# Altium PCB PCB1.PcbDoc (part 11 of 12)
Units mm, origin at the board's own origin, x right, y up, seen from the top; angles counter-clockwise.
Board outline 122.17 x 121.67 mm, 2 copper layers (Top Layer, Bottom Layer); 274 components, 225 nets, 941 pads, 421 vias.
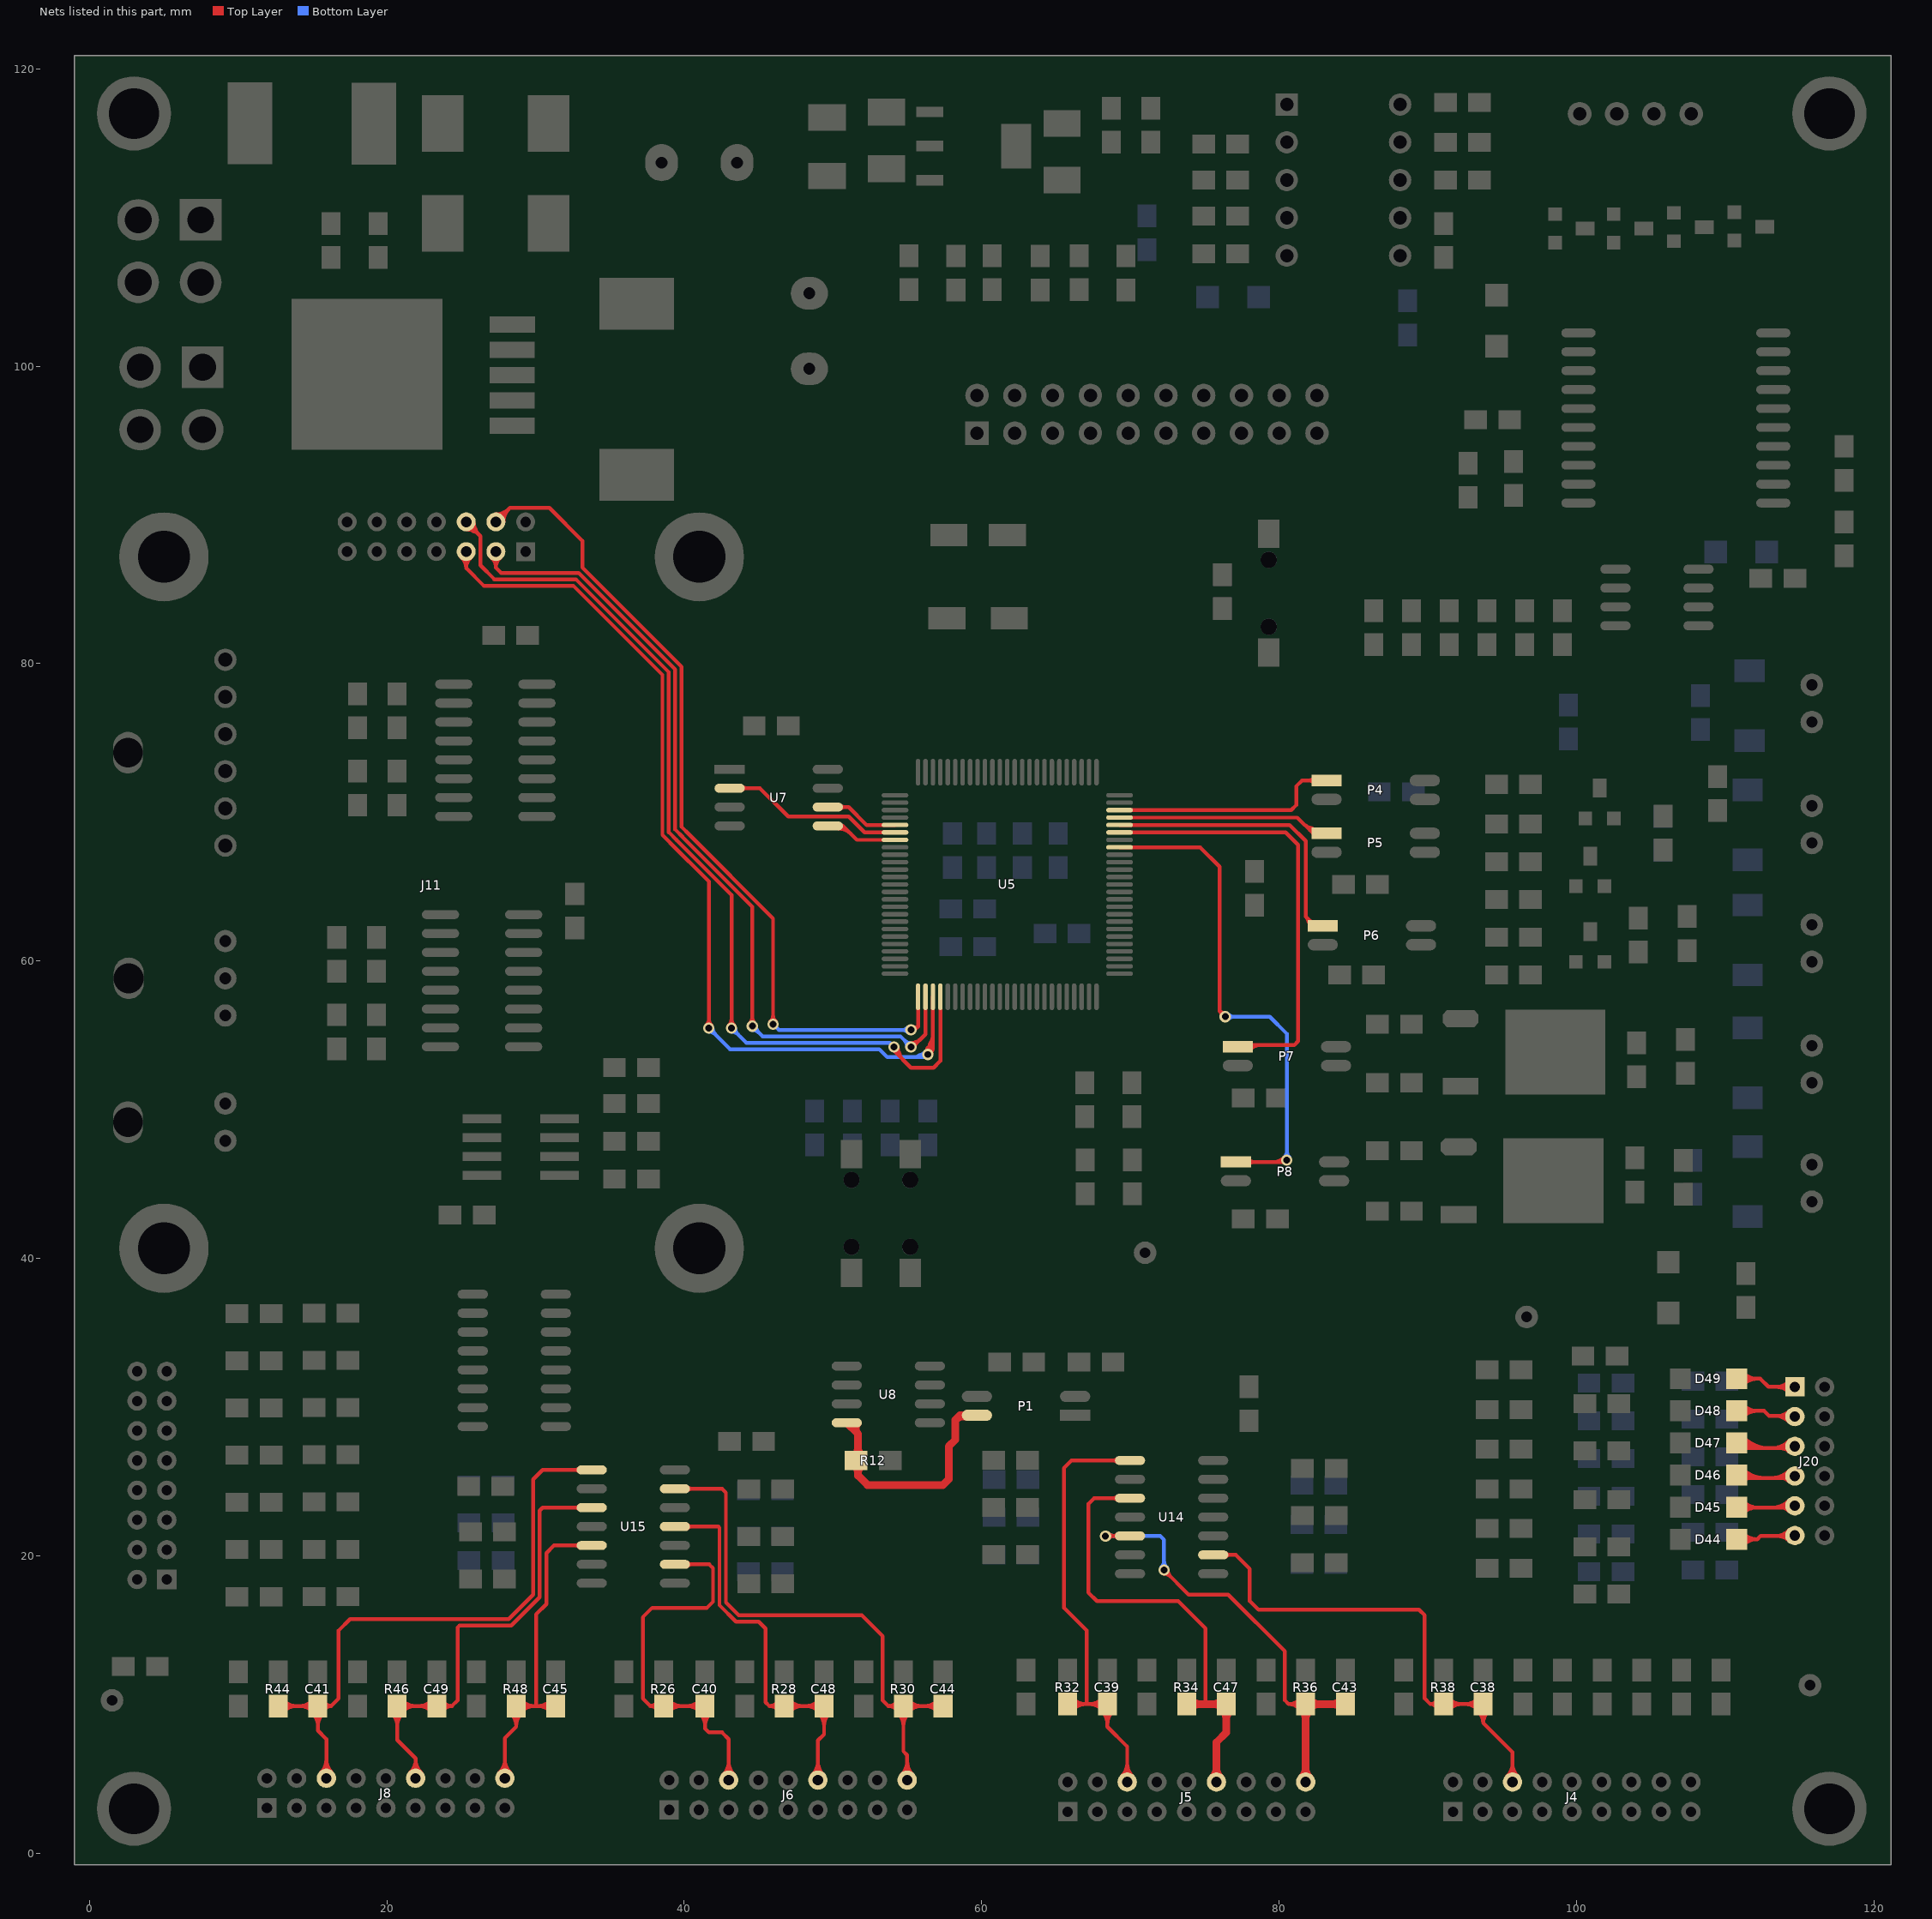
[diagram p11: the nets of this part, all layers, seen from the top]

## Via types
v1: diameter 0.762, hole 0.457, Top Layer to Bottom Layer, 339 vias
v2: diameter 1.27, hole 0.457, Top Layer to Bottom Layer, 39 vias
v3: diameter 0.889, hole 0.457, Top Layer to Bottom Layer, 21 vias
v4: diameter 1.27, hole 0.711, Top Layer to Bottom Layer, 12 vias
v5: diameter 1.524, hole 0.711, Top Layer to Bottom Layer, 5 vias
v6: diameter 1.016, hole 0.457, Top Layer to Bottom Layer, 3 vias
v7: diameter 0.711, hole 0.457, Top Layer to Bottom Layer, 1 vias
v8: diameter 1.524, hole 0.457, Top Layer to Bottom Layer, 1 vias

## Nets (pads, with @x,y where several pads share a name; then routed paths per layer and width w, separated by ;. In a path a pad name is that pad's centre, name@x,y a point inside that pad or via, vN(x,y) a via of type N, cw(c..) or ccw(c..) an arc to the next point about the centre after c; other vN are vias at no path point) (continued)
SENSER3: C38.1 J4.6 R38.2 U14.9 | length 68.2
  Top Layer w0.254: U14.9@75.565,20.066 77.089,20.066 78.029,19.126 78.029,16.967 78.613,16.383 89.408,16.383 89.789,16.002 89.789,10.414 90.17,10.033 ; J4.6@95.694,4.794 95.694,6.795 93.726,8.763 ; U14.9@76.402,19.94 cw(c76.705,19.637) 76.705,20.066 ; U14.9@76.402,19.94 cw(c76.705,19.637) 76.705,20.066 ; U14.9@76.402,19.94 cw(c76.705,19.637) 76.705,20.066 ; U14.9@76.402,19.94 cw(c76.705,19.637) 76.705,20.066 ; U14.9@76.402,20.192 ccw(c76.705,20.495) 76.705,20.066 ; U14.9@76.402,20.192 ccw(c76.705,20.495) 76.705,20.066 ; U14.9@76.402,20.192 ccw(c76.705,20.495) 76.705,20.066 ; U14.9@76.402,20.192 ccw(c76.705,20.495) 76.705,20.066 ; 90.17,10.033 cw(c90.17,9.509) R38.2@90.621,9.775 ; 90.17,10.033 ccw(c90.17,10.557) R38.2@90.621,10.291 ; 90.17,10.033 cw(c90.17,9.509) R38.2@90.621,9.775 ; 90.17,10.033 ccw(c90.17,10.557) R38.2@90.621,10.291 ; 90.17,10.033 cw(c90.17,9.509) R38.2@90.621,9.775 ; 90.17,10.033 ccw(c90.17,10.557) R38.2@90.621,10.291 ; 90.17,10.033 cw(c90.17,9.509) R38.2@90.621,9.775 ; 90.17,10.033 ccw(c90.17,10.557) R38.2@90.621,10.291 ; 90.17,10.033 R38.2@91.059,10.033 C38.1@93.726,10.033 93.726,8.763 ; R38.2@91.418,9.674 cw(c92.285,8.807) 92.285,10.033 ; R38.2@91.418,9.674 cw(c92.285,8.807) 92.285,10.033 ; R38.2@91.418,9.674 cw(c92.285,8.807) 92.285,10.033 ; R38.2@91.418,9.674 cw(c92.285,8.807) 92.285,10.033 ; R38.2@91.418,10.392 ccw(c92.285,11.259) 92.285,10.033 ; R38.2@91.418,10.392 ccw(c92.285,11.259) 92.285,10.033 ; R38.2@91.418,10.392 ccw(c92.285,11.259) 92.285,10.033 ; R38.2@91.418,10.392 ccw(c92.285,11.259) 92.285,10.033 ; 92.5,10.033 cw(c92.5,8.807) C38.1@93.367,9.674 ; 92.5,10.033 ccw(c92.5,11.259) C38.1@93.367,10.392 ; 92.5,10.033 cw(c92.5,8.807) C38.1@93.367,9.674 ; 92.5,10.033 ccw(c92.5,11.259) C38.1@93.367,10.392 ; 92.5,10.033 cw(c92.5,8.807) C38.1@93.367,9.674 ; 92.5,10.033 ccw(c92.5,11.259) C38.1@93.367,10.392 ; 92.5,10.033 cw(c92.5,8.807) C38.1@93.367,9.674 ; 92.5,10.033 ccw(c92.5,11.259) C38.1@93.367,10.392 ; C38.1@93.386,9.529 cw(c92.694,8.763) 93.726,8.763 ; C38.1@93.386,9.529 cw(c92.694,8.763) 93.726,8.763 ; C38.1@93.386,9.529 cw(c92.694,8.763) 93.726,8.763 ; C38.1@93.386,9.529 cw(c92.694,8.763) 93.726,8.763 ; 93.726,8.763 cw(c94.758,8.763) C38.1@94.066,9.529 ; 93.726,8.763 cw(c94.758,8.763) C38.1@94.066,9.529 ; 93.726,8.763 cw(c94.758,8.763) C38.1@94.066,9.529 ; 93.726,8.763 cw(c94.758,8.763) C38.1@94.066,9.529 ; J4.6@95.324,5.164 ccw(c94.431,6.057) 95.694,6.057 ; J4.6@95.324,5.164 ccw(c94.431,6.057) 95.694,6.057 ; J4.6@95.324,5.164 ccw(c94.431,6.057) 95.694,6.057 ; 95.694,6.057 ccw(c96.957,6.057) J4.6@96.064,5.164 ; 95.694,6.057 ccw(c96.957,6.057) J4.6@96.064,5.164 ; 95.694,6.057 ccw(c96.957,6.057) J4.6@96.064,5.164
SENSER4: C43.1 J5.18 R36.2 U14.5 | length 71.6
  Top Layer w0.254: v1(68.326,21.336) U14.5@69.977,21.336 ; R36.2@81.788,10.033 80.645,10.033 ; v1@68.506,21.156 cw(c68.939,20.723) 68.939,21.336 ; v1@68.506,21.156 cw(c68.939,20.723) 68.939,21.336 ; v1@68.506,21.156 cw(c68.939,20.723) 68.939,21.336 ; v1@68.506,21.516 ccw(c68.939,21.949) 68.939,21.336 ; v1@68.506,21.516 ccw(c68.939,21.949) 68.939,21.336 ; v1@68.506,21.516 ccw(c68.939,21.949) 68.939,21.336 ; 68.837,21.336 cw(c68.837,20.907) U14.5@69.14,21.21 ; 68.837,21.336 ccw(c68.837,21.765) U14.5@69.14,21.462 ; 68.837,21.336 cw(c68.837,20.907) U14.5@69.14,21.21 ; 68.837,21.336 ccw(c68.837,21.765) U14.5@69.14,21.462 ; 68.837,21.336 cw(c68.837,20.907) U14.5@69.14,21.21 ; 68.837,21.336 ccw(c68.837,21.765) U14.5@69.14,21.462 ; v1@72.263,18.796 cw(c72.263,18.183) 72.697,18.616 ; v1@72.263,18.796 cw(c72.263,18.183) 72.697,18.616 ; v1@72.263,18.796 cw(c72.263,18.183) 72.697,18.616 ; v1(72.263,19.05) ccw(c72.698,19.139) 72.583,18.71 ; v1(72.263,19.05) ccw(c72.698,19.139) 72.583,18.71 ; v1(72.263,19.05) cw(c72.174,18.615) 72.603,18.73 ; v1(72.263,19.05) cw(c72.174,18.615) 72.603,18.73 ; v1(72.263,19.05) ccw(c72.698,19.139) 72.583,18.71 ; v1(72.263,19.05) cw(c72.174,18.615) 72.603,18.73 ; v1(72.263,19.05) 73.914,17.399 76.581,17.399 80.391,13.589 80.391,10.287 80.645,10.033 ; v1@72.517,19.05 ccw(c73.13,19.05) 72.697,18.616 ; v1@72.517,19.05 ccw(c73.13,19.05) 72.697,18.616 ; v1@72.517,19.05 ccw(c73.13,19.05) 72.697,18.616 ; 80.645,10.033 cw(c80.645,9.001) R36.2@81.411,9.693 ; 80.645,10.033 ccw(c80.645,11.065) R36.2@81.411,10.373 ; 80.645,10.033 cw(c80.645,9.001) R36.2@81.411,9.693 ; 80.645,10.033 ccw(c80.645,11.065) R36.2@81.411,10.373 ; 80.645,10.033 cw(c80.645,9.001) R36.2@81.411,9.693 ; 80.645,10.033 ccw(c80.645,11.065) R36.2@81.411,10.373
  Top Layer w0.508: J5.18@81.659,4.734 81.788,4.863 R36.2@81.788,10.033 C43.1@84.455,10.033 ; J5.18@81.506,5.074 ccw(c80.825,5.755) 81.788,5.755 ; J5.18@81.506,5.074 ccw(c80.825,5.755) 81.788,5.755 ; J5.18@81.506,5.074 ccw(c80.825,5.755) 81.788,5.755 ; R36.2@81.519,9.637 cw(c80.868,8.986) 81.788,8.986 ; R36.2@81.519,9.637 cw(c80.868,8.986) 81.788,8.986 ; R36.2@81.519,9.637 cw(c80.868,8.986) 81.788,8.986 ; 81.788,5.745 ccw(c82.737,5.745) J5.18@82.066,5.074 ; 81.788,5.745 ccw(c82.737,5.745) J5.18@82.066,5.074 ; 81.788,5.745 ccw(c82.737,5.745) J5.18@82.066,5.074 ; 81.788,8.986 cw(c82.708,8.986) R36.2@82.057,9.637 ; 81.788,8.986 cw(c82.708,8.986) R36.2@82.057,9.637 ; 81.788,8.986 cw(c82.708,8.986) R36.2@82.057,9.637 ; R36.2@82.057,9.764 cw(c82.708,9.113) 82.708,10.033 ; R36.2@82.057,9.764 cw(c82.708,9.113) 82.708,10.033 ; R36.2@82.057,9.764 cw(c82.708,9.113) 82.708,10.033 ; R36.2@82.057,10.302 ccw(c82.708,10.953) 82.708,10.033 ; R36.2@82.057,10.302 ccw(c82.708,10.953) 82.708,10.033 ; R36.2@82.057,10.302 ccw(c82.708,10.953) 82.708,10.033 ; 83.535,10.033 cw(c83.535,9.113) C43.1@84.186,9.764 ; 83.535,10.033 ccw(c83.535,10.953) C43.1@84.186,10.302 ; 83.535,10.033 cw(c83.535,9.113) C43.1@84.186,9.764 ; 83.535,10.033 ccw(c83.535,10.953) C43.1@84.186,10.302 ; 83.535,10.033 cw(c83.535,9.113) C43.1@84.186,9.764 ; 83.535,10.033 ccw(c83.535,10.953) C43.1@84.186,10.302 ; 83.535,10.033 cw(c83.535,9.113) C43.1@84.186,9.764 ; 83.535,10.033 ccw(c83.535,10.953) C43.1@84.186,10.302
  Bottom Layer w0.254: v1(68.326,21.336) 72.009,21.336 72.263,21.082 v1(72.263,19.05) ; v1@68.506,21.156 cw(c68.939,20.723) 68.939,21.336 ; v1@68.506,21.156 cw(c68.939,20.723) 68.939,21.336 ; v1@68.506,21.156 cw(c68.939,20.723) 68.939,21.336 ; v1@68.506,21.516 ccw(c68.939,21.949) 68.939,21.336 ; v1@68.506,21.516 ccw(c68.939,21.949) 68.939,21.336 ; v1@68.506,21.516 ccw(c68.939,21.949) 68.939,21.336 ; v1@72.083,19.23 ccw(c71.65,19.663) 72.263,19.663 ; v1@72.083,19.23 ccw(c71.65,19.663) 72.263,19.663 ; v1@72.083,19.23 ccw(c71.65,19.663) 72.263,19.663 ; 72.263,19.663 ccw(c72.876,19.663) v1@72.443,19.23 ; 72.263,19.663 ccw(c72.876,19.663) v1@72.443,19.23 ; 72.263,19.663 ccw(c72.876,19.663) v1@72.443,19.23
SENSER5: C47.1 J5.12 R34.2 U14.3 | length 55.6
  Top Layer w0.254: U14.3@69.977,23.876 67.564,23.876 67.183,23.495 67.183,17.526 67.754,16.954 73.215,16.954 75.057,15.113 75.057,10.033 ; 68.837,23.876 cw(c68.837,23.447) U14.3@69.14,23.75 ; 68.837,23.876 ccw(c68.837,24.305) U14.3@69.14,24.002 ; 68.837,23.876 cw(c68.837,23.447) U14.3@69.14,23.75 ; 68.837,23.876 ccw(c68.837,24.305) U14.3@69.14,24.002 ; 68.837,23.876 cw(c68.837,23.447) U14.3@69.14,23.75 ; 68.837,23.876 ccw(c68.837,24.305) U14.3@69.14,24.002 ; 68.837,23.876 cw(c68.837,23.447) U14.3@69.14,23.75 ; 68.837,23.876 ccw(c68.837,24.305) U14.3@69.14,24.002
  Top Layer w0.508: R34.2@73.787,10.033 75.057,10.033 C47.1@76.454,10.033 76.454,8.128 75.786,7.46 J5.12@75.786,4.794 ; R34.2@74.056,9.764 cw(c74.707,9.113) 74.707,10.033 ; R34.2@74.056,9.764 cw(c74.707,9.113) 74.707,10.033 ; R34.2@74.056,9.764 cw(c74.707,9.113) 74.707,10.033 ; R34.2@74.056,9.764 cw(c74.707,9.113) 74.707,10.033 ; R34.2@74.056,10.302 ccw(c74.707,10.953) 74.707,10.033 ; R34.2@74.056,10.302 ccw(c74.707,10.953) 74.707,10.033 ; R34.2@74.056,10.302 ccw(c74.707,10.953) 74.707,10.033 ; R34.2@74.056,10.302 ccw(c74.707,10.953) 74.707,10.033 ; J5.12@75.506,5.074 ccw(c74.83,5.75) 75.786,5.75 ; J5.12@75.506,5.074 ccw(c74.83,5.75) 75.786,5.75 ; J5.12@75.506,5.074 ccw(c74.83,5.75) 75.786,5.75 ; 75.534,10.033 cw(c75.534,9.113) C47.1@76.185,9.764 ; 75.534,10.033 ccw(c75.534,10.953) C47.1@76.185,10.302 ; 75.534,10.033 cw(c75.534,9.113) C47.1@76.185,9.764 ; 75.534,10.033 ccw(c75.534,10.953) C47.1@76.185,10.302 ; 75.534,10.033 cw(c75.534,9.113) C47.1@76.185,9.764 ; 75.534,10.033 ccw(c75.534,10.953) C47.1@76.185,10.302 ; 75.534,10.033 cw(c75.534,9.113) C47.1@76.185,9.764 ; 75.534,10.033 ccw(c75.534,10.953) C47.1@76.185,10.302 ; 75.786,5.75 ccw(c76.742,5.75) J5.12@76.066,5.074 ; 75.786,5.75 ccw(c76.742,5.75) J5.12@76.066,5.074 ; 75.786,5.75 ccw(c76.742,5.75) J5.12@76.066,5.074 ; C47.1@76.185,9.637 cw(c75.534,8.986) 76.454,8.986 ; C47.1@76.185,9.637 cw(c75.534,8.986) 76.454,8.986 ; C47.1@76.185,9.637 cw(c75.534,8.986) 76.454,8.986 ; C47.1@76.185,9.637 cw(c75.534,8.986) 76.454,8.986 ; 76.454,8.986 cw(c77.374,8.986) C47.1@76.723,9.637 ; 76.454,8.986 cw(c77.374,8.986) C47.1@76.723,9.637 ; 76.454,8.986 cw(c77.374,8.986) C47.1@76.723,9.637 ; 76.454,8.986 cw(c77.374,8.986) C47.1@76.723,9.637
SENSER6: C39.1 J5.6 R32.2 U14.1 | length 61.4
  Top Layer w0.254: R32.2@65.786,10.033 67.056,10.033 ; J5.6@69.786,4.794 69.786,7.176 68.453,8.509 C39.1@68.453,10.033 67.056,10.033 ; U14.1@69.977,26.416 66.04,26.416 65.532,25.908 65.532,16.51 67.056,14.986 67.056,10.033 ; R32.2@66.145,9.674 cw(c67.012,8.807) 67.012,10.033 ; R32.2@66.145,9.674 cw(c67.012,8.807) 67.012,10.033 ; R32.2@66.145,9.674 cw(c67.012,8.807) 67.012,10.033 ; R32.2@66.145,9.674 cw(c67.012,8.807) 67.012,10.033 ; R32.2@66.145,10.392 ccw(c67.012,11.259) 67.012,10.033 ; R32.2@66.145,10.392 ccw(c67.012,11.259) 67.012,10.033 ; R32.2@66.145,10.392 ccw(c67.012,11.259) 67.012,10.033 ; R32.2@66.145,10.392 ccw(c67.012,11.259) 67.012,10.033 ; 67.227,10.033 cw(c67.227,8.807) C39.1@68.094,9.674 ; 67.227,10.033 ccw(c67.227,11.259) C39.1@68.094,10.392 ; 67.227,10.033 cw(c67.227,8.807) C39.1@68.094,9.674 ; 67.227,10.033 ccw(c67.227,11.259) C39.1@68.094,10.392 ; 67.227,10.033 cw(c67.227,8.807) C39.1@68.094,9.674 ; 67.227,10.033 ccw(c67.227,11.259) C39.1@68.094,10.392 ; 67.227,10.033 cw(c67.227,8.807) C39.1@68.094,9.674 ; 67.227,10.033 ccw(c67.227,11.259) C39.1@68.094,10.392 ; C39.1@68.094,9.547 cw(c67.227,8.68) 68.453,8.68 ; C39.1@68.094,9.547 cw(c67.227,8.68) 68.453,8.68 ; C39.1@68.094,9.547 cw(c67.227,8.68) 68.453,8.68 ; C39.1@68.094,9.547 cw(c67.227,8.68) 68.453,8.68 ; 68.453,8.68 cw(c69.679,8.68) C39.1@68.812,9.547 ; 68.453,8.68 cw(c69.679,8.68) C39.1@68.812,9.547 ; 68.453,8.68 cw(c69.679,8.68) C39.1@68.812,9.547 ; 68.453,8.68 cw(c69.679,8.68) C39.1@68.812,9.547 ; 68.837,26.416 cw(c68.837,25.987) U14.1@69.14,26.29 ; 68.837,26.416 ccw(c68.837,26.845) U14.1@69.14,26.542 ; 68.837,26.416 cw(c68.837,25.987) U14.1@69.14,26.29 ; 68.837,26.416 ccw(c68.837,26.845) U14.1@69.14,26.542 ; 68.837,26.416 cw(c68.837,25.987) U14.1@69.14,26.29 ; 68.837,26.416 ccw(c68.837,26.845) U14.1@69.14,26.542 ; 68.837,26.416 cw(c68.837,25.987) U14.1@69.14,26.29 ; 68.837,26.416 ccw(c68.837,26.845) U14.1@69.14,26.542 ; J5.6@69.416,5.164 ccw(c68.523,6.057) 69.786,6.057 ; J5.6@69.416,5.164 ccw(c68.523,6.057) 69.786,6.057 ; J5.6@69.416,5.164 ccw(c68.523,6.057) 69.786,6.057 ; 69.786,6.057 ccw(c71.049,6.057) J5.6@70.156,5.164 ; 69.786,6.057 ccw(c71.049,6.057) J5.6@70.156,5.164 ; 69.786,6.057 ccw(c71.049,6.057) J5.6@70.156,5.164
SENSER7: C44.1 J6.18 R30.2 U15.13 | length 73.4
  Top Layer w0.254: U15.13@39.37,24.511 42.545,24.511 42.799,24.257 42.799,16.867 43.664,16.002 51.943,16.002 53.34,14.605 53.34,10.287 53.721,9.906 ; J6.18@54.989,4.921 54.989,6.606 54.737,6.858 R30.2@54.737,9.906 ; C44.1@57.404,9.906 R30.2@54.737,9.906 ; U15.13@40.207,24.385 cw(c40.51,24.082) 40.51,24.511 ; U15.13@40.207,24.385 cw(c40.51,24.082) 40.51,24.511 ; U15.13@40.207,24.385 cw(c40.51,24.082) 40.51,24.511 ; U15.13@40.207,24.385 cw(c40.51,24.082) 40.51,24.511 ; U15.13@40.207,24.637 ccw(c40.51,24.94) 40.51,24.511 ; U15.13@40.207,24.637 ccw(c40.51,24.94) 40.51,24.511 ; U15.13@40.207,24.637 ccw(c40.51,24.94) 40.51,24.511 ; U15.13@40.207,24.637 ccw(c40.51,24.94) 40.51,24.511 ; 53.721,9.906 cw(c53.721,9.144) R30.2@54.331,9.601 ; 53.721,9.906 ccw(c53.721,10.668) R30.2@54.331,10.211 ; 53.721,9.906 cw(c53.721,9.144) R30.2@54.331,9.601 ; 53.721,9.906 ccw(c53.721,10.668) R30.2@54.331,10.211 ; 53.721,9.906 cw(c53.721,9.144) R30.2@54.331,9.601 ; 53.721,9.906 ccw(c53.721,10.668) R30.2@54.331,10.211 ; 53.721,9.906 cw(c53.721,9.144) R30.2@54.331,9.601 ; 53.721,9.906 ccw(c53.721,10.668) R30.2@54.331,10.211 ; 53.721,9.906 R30.2@54.737,9.906 ; R30.2@54.378,9.42 cw(c53.511,8.553) 54.737,8.553 ; R30.2@54.378,9.42 cw(c53.511,8.553) 54.737,8.553 ; R30.2@54.378,9.42 cw(c53.511,8.553) 54.737,8.553 ; R30.2@54.378,9.42 cw(c53.511,8.553) 54.737,8.553 ; J6.18@54.619,5.291 ccw(c53.726,6.184) 54.989,6.184 ; J6.18@54.619,5.291 ccw(c53.726,6.184) 54.989,6.184 ; J6.18@54.619,5.291 ccw(c53.726,6.184) 54.989,6.184 ; 54.737,8.553 cw(c55.963,8.553) R30.2@55.096,9.42 ; 54.737,8.553 cw(c55.963,8.553) R30.2@55.096,9.42 ; 54.737,8.553 cw(c55.963,8.553) R30.2@55.096,9.42 ; 54.737,8.553 cw(c55.963,8.553) R30.2@55.096,9.42 ; 54.989,6.184 ccw(c56.252,6.184) J6.18@55.359,5.291 ; 54.989,6.184 ccw(c56.252,6.184) J6.18@55.359,5.291 ; 54.989,6.184 ccw(c56.252,6.184) J6.18@55.359,5.291 ; R30.2@55.096,9.547 cw(c55.963,8.68) 55.963,9.906 ; R30.2@55.096,9.547 cw(c55.963,8.68) 55.963,9.906 ; R30.2@55.096,9.547 cw(c55.963,8.68) 55.963,9.906 ; R30.2@55.096,9.547 cw(c55.963,8.68) 55.963,9.906 ; R30.2@55.096,10.265 ccw(c55.963,11.132) 55.963,9.906 ; R30.2@55.096,10.265 ccw(c55.963,11.132) 55.963,9.906 ; R30.2@55.096,10.265 ccw(c55.963,11.132) 55.963,9.906 ; R30.2@55.096,10.265 ccw(c55.963,11.132) 55.963,9.906 ; 56.178,9.906 cw(c56.178,8.68) C44.1@57.045,9.547 ; 56.178,9.906 ccw(c56.178,11.132) C44.1@57.045,10.265 ; 56.178,9.906 cw(c56.178,8.68) C44.1@57.045,9.547 ; 56.178,9.906 ccw(c56.178,11.132) C44.1@57.045,10.265 ; 56.178,9.906 cw(c56.178,8.68) C44.1@57.045,9.547 ; 56.178,9.906 ccw(c56.178,11.132) C44.1@57.045,10.265 ; 56.178,9.906 cw(c56.178,8.68) C44.1@57.045,9.547 ; 56.178,9.906 ccw(c56.178,11.132) C44.1@57.045,10.265
SENSER8: C48.1 J6.12 R28.2 U15.11 | length 63.6
  Top Layer w0.254: U15.11@39.37,21.971 42.291,21.971 42.367,21.895 42.367,16.688 43.485,15.57 45.009,15.57 45.466,15.113 45.466,10.16 45.72,9.906 ; J6.12@48.989,4.921 48.989,7.587 49.403,8.001 C48.1@49.403,9.906 R28.2@46.736,9.906 45.72,9.906 ; U15.11@40.207,21.845 cw(c40.51,21.542) 40.51,21.971 ; U15.11@40.207,21.845 cw(c40.51,21.542) 40.51,21.971 ; U15.11@40.207,21.845 cw(c40.51,21.542) 40.51,21.971 ; U15.11@40.207,21.845 cw(c40.51,21.542) 40.51,21.971 ; U15.11@40.207,22.097 ccw(c40.51,22.4) 40.51,21.971 ; U15.11@40.207,22.097 ccw(c40.51,22.4) 40.51,21.971 ; U15.11@40.207,22.097 ccw(c40.51,22.4) 40.51,21.971 ; U15.11@40.207,22.097 ccw(c40.51,22.4) 40.51,21.971 ; 45.72,9.906 cw(c45.72,9.144) R28.2@46.33,9.601 ; 45.72,9.906 ccw(c45.72,10.668) R28.2@46.33,10.211 ; 45.72,9.906 cw(c45.72,9.144) R28.2@46.33,9.601 ; 45.72,9.906 ccw(c45.72,10.668) R28.2@46.33,10.211 ; 45.72,9.906 cw(c45.72,9.144) R28.2@46.33,9.601 ; 45.72,9.906 ccw(c45.72,10.668) R28.2@46.33,10.211 ; 45.72,9.906 cw(c45.72,9.144) R28.2@46.33,9.601 ; 45.72,9.906 ccw(c45.72,10.668) R28.2@46.33,10.211 ; R28.2@47.095,9.547 cw(c47.962,8.68) 47.962,9.906 ; R28.2@47.095,9.547 cw(c47.962,8.68) 47.962,9.906 ; R28.2@47.095,9.547 cw(c47.962,8.68) 47.962,9.906 ; R28.2@47.095,9.547 cw(c47.962,8.68) 47.962,9.906 ; R28.2@47.095,10.265 ccw(c47.962,11.132) 47.962,9.906 ; R28.2@47.095,10.265 ccw(c47.962,11.132) 47.962,9.906 ; R28.2@47.095,10.265 ccw(c47.962,11.132) 47.962,9.906 ; R28.2@47.095,10.265 ccw(c47.962,11.132) 47.962,9.906 ; 48.177,9.906 cw(c48.177,8.68) C48.1@49.044,9.547 ; 48.177,9.906 ccw(c48.177,11.132) C48.1@49.044,10.265 ; 48.177,9.906 cw(c48.177,8.68) C48.1@49.044,9.547 ; 48.177,9.906 ccw(c48.177,11.132) C48.1@49.044,10.265 ; 48.177,9.906 cw(c48.177,8.68) C48.1@49.044,9.547 ; 48.177,9.906 ccw(c48.177,11.132) C48.1@49.044,10.265 ; 48.177,9.906 cw(c48.177,8.68) C48.1@49.044,9.547 ; 48.177,9.906 ccw(c48.177,11.132) C48.1@49.044,10.265 ; J6.12@48.619,5.291 ccw(c47.726,6.184) 48.989,6.184 ; J6.12@48.619,5.291 ccw(c47.726,6.184) 48.989,6.184 ; J6.12@48.619,5.291 ccw(c47.726,6.184) 48.989,6.184 ; 48.989,6.184 ccw(c50.252,6.184) J6.12@49.359,5.291 ; 48.989,6.184 ccw(c50.252,6.184) J6.12@49.359,5.291 ; 48.989,6.184 ccw(c50.252,6.184) J6.12@49.359,5.291 ; C48.1@49.044,9.42 cw(c48.177,8.553) 49.403,8.553 ; C48.1@49.044,9.42 cw(c48.177,8.553) 49.403,8.553 ; C48.1@49.044,9.42 cw(c48.177,8.553) 49.403,8.553 ; C48.1@49.044,9.42 cw(c48.177,8.553) 49.403,8.553 ; 49.403,8.553 cw(c50.629,8.553) C48.1@49.762,9.42 ; 49.403,8.553 cw(c50.629,8.553) C48.1@49.762,9.42 ; 49.403,8.553 cw(c50.629,8.553) C48.1@49.762,9.42 ; 49.403,8.553 cw(c50.629,8.553) C48.1@49.762,9.42
SENSER9: C40.1 J6.6 R26.2 U15.9 | length 62.2
  Top Layer w0.254: U15.9@39.37,19.431 41.681,19.431 41.935,19.177 41.935,16.916 41.529,16.51 37.846,16.51 37.211,15.875 37.211,10.414 37.719,9.906 ; J6.6@42.989,4.921 42.989,7.684 42.545,8.128 41.656,8.128 41.402,8.382 C40.1@41.402,9.906 R26.2@38.608,9.906 37.719,9.906 ; 37.719,9.906 cw(c37.719,9.382) R26.2@38.17,9.648 ; 37.719,9.906 ccw(c37.719,10.43) R26.2@38.17,10.164 ; 37.719,9.906 cw(c37.719,9.382) R26.2@38.17,9.648 ; 37.719,9.906 ccw(c37.719,10.43) R26.2@38.17,10.164 ; 37.719,9.906 cw(c37.719,9.382) R26.2@38.17,9.648 ; 37.719,9.906 ccw(c37.719,10.43) R26.2@38.17,10.164 ; 37.719,9.906 cw(c37.719,9.382) R26.2@38.17,9.648 ; 37.719,9.906 ccw(c37.719,10.43) R26.2@38.17,10.164 ; R26.2@38.967,9.547 cw(c39.834,8.68) 39.834,9.906 ; R26.2@38.967,9.547 cw(c39.834,8.68) 39.834,9.906 ; R26.2@38.967,9.547 cw(c39.834,8.68) 39.834,9.906 ; R26.2@38.967,9.547 cw(c39.834,8.68) 39.834,9.906 ; R26.2@38.967,10.265 ccw(c39.834,11.132) 39.834,9.906 ; R26.2@38.967,10.265 ccw(c39.834,11.132) 39.834,9.906 ; R26.2@38.967,10.265 ccw(c39.834,11.132) 39.834,9.906 ; R26.2@38.967,10.265 ccw(c39.834,11.132) 39.834,9.906 ; 40.176,9.906 cw(c40.176,8.68) C40.1@41.043,9.547 ; 40.176,9.906 ccw(c40.176,11.132) C40.1@41.043,10.265 ; 40.176,9.906 cw(c40.176,8.68) C40.1@41.043,9.547 ; 40.176,9.906 ccw(c40.176,11.132) C40.1@41.043,10.265 ; 40.176,9.906 cw(c40.176,8.68) C40.1@41.043,9.547 ; 40.176,9.906 ccw(c40.176,11.132) C40.1@41.043,10.265 ; 40.176,9.906 cw(c40.176,8.68) C40.1@41.043,9.547 ; 40.176,9.906 ccw(c40.176,11.132) C40.1@41.043,10.265 ; U15.9@40.207,19.305 cw(c40.51,19.002) 40.51,19.431 ; U15.9@40.207,19.305 cw(c40.51,19.002) 40.51,19.431 ; U15.9@40.207,19.305 cw(c40.51,19.002) 40.51,19.431 ; U15.9@40.207,19.305 cw(c40.51,19.002) 40.51,19.431 ; U15.9@40.207,19.557 ccw(c40.51,19.86) 40.51,19.431 ; U15.9@40.207,19.557 ccw(c40.51,19.86) 40.51,19.431 ; U15.9@40.207,19.557 ccw(c40.51,19.86) 40.51,19.431 ; U15.9@40.207,19.557 ccw(c40.51,19.86) 40.51,19.431 ; C40.1@41.043,9.42 cw(c40.176,8.553) 41.402,8.553 ; C40.1@41.043,9.42 cw(c40.176,8.553) 41.402,8.553 ; C40.1@41.043,9.42 cw(c40.176,8.553) 41.402,8.553 ; C40.1@41.043,9.42 cw(c40.176,8.553) 41.402,8.553 ; 41.402,8.553 cw(c42.628,8.553) C40.1@41.761,9.42 ; 41.402,8.553 cw(c42.628,8.553) C40.1@41.761,9.42 ; 41.402,8.553 cw(c42.628,8.553) C40.1@41.761,9.42 ; 41.402,8.553 cw(c42.628,8.553) C40.1@41.761,9.42 ; J6.6@42.619,5.291 ccw(c41.726,6.184) 42.989,6.184 ; J6.6@42.619,5.291 ccw(c41.726,6.184) 42.989,6.184 ; J6.6@42.619,5.291 ccw(c41.726,6.184) 42.989,6.184 ; 42.989,6.184 ccw(c44.252,6.184) J6.6@43.359,5.291 ; 42.989,6.184 ccw(c44.252,6.184) J6.6@43.359,5.291 ; 42.989,6.184 ccw(c44.252,6.184) J6.6@43.359,5.291
SENSER10: C45.1 J8.18 R48.2 U15.5 | length 53.6
  Top Layer w0.254: J8.18@27.938,4.914 27.938,7.745 28.702,8.509 R48.2@28.702,9.906 30.035,9.906 ; C45.1@31.369,9.906 30.035,9.906 ; U15.5@33.782,20.701 31.242,20.701 30.734,20.193 30.734,16.764 30.035,16.066 30.035,9.906 ; J8.18@27.568,5.418 ccw(c26.675,6.311) 27.938,6.311 ; J8.18@27.568,5.418 ccw(c26.675,6.311) 27.938,6.311 ; J8.18@27.568,5.418 ccw(c26.675,6.311) 27.938,6.311 ; 27.938,6.311 ccw(c29.201,6.311) J8.18@28.308,5.418 ; 27.938,6.311 ccw(c29.201,6.311) J8.18@28.308,5.418 ; 27.938,6.311 ccw(c29.201,6.311) J8.18@28.308,5.418 ; R48.2@28.343,9.42 cw(c27.476,8.553) 28.702,8.553 ; R48.2@28.343,9.42 cw(c27.476,8.553) 28.702,8.553 ; R48.2@28.343,9.42 cw(c27.476,8.553) 28.702,8.553 ; R48.2@28.343,9.42 cw(c27.476,8.553) 28.702,8.553 ; 28.702,8.553 cw(c29.928,8.553) R48.2@29.061,9.42 ; 28.702,8.553 cw(c29.928,8.553) R48.2@29.061,9.42 ; 28.702,8.553 cw(c29.928,8.553) R48.2@29.061,9.42 ; 28.702,8.553 cw(c29.928,8.553) R48.2@29.061,9.42 ; R48.2@29.061,9.547 cw(c29.928,8.68) 29.928,9.906 ; R48.2@29.061,9.547 cw(c29.928,8.68) 29.928,9.906 ; R48.2@29.061,9.547 cw(c29.928,8.68) 29.928,9.906 ; R48.2@29.061,9.547 cw(c29.928,8.68) 29.928,9.906 ; R48.2@29.061,10.265 ccw(c29.928,11.132) 29.928,9.906 ; R48.2@29.061,10.265 ccw(c29.928,11.132) 29.928,9.906 ; R48.2@29.061,10.265 ccw(c29.928,11.132) 29.928,9.906 ; R48.2@29.061,10.265 ccw(c29.928,11.132) 29.928,9.906 ; 30.143,9.906 cw(c30.143,8.68) C45.1@31.01,9.547 ; 30.143,9.906 ccw(c30.143,11.132) C45.1@31.01,10.265 ; 30.143,9.906 cw(c30.143,8.68) C45.1@31.01,9.547 ; 30.143,9.906 ccw(c30.143,11.132) C45.1@31.01,10.265 ; 30.143,9.906 cw(c30.143,8.68) C45.1@31.01,9.547 ; 30.143,9.906 ccw(c30.143,11.132) C45.1@31.01,10.265 ; 30.143,9.906 cw(c30.143,8.68) C45.1@31.01,9.547 ; 30.143,9.906 ccw(c30.143,11.132) C45.1@31.01,10.265 ; 32.642,20.701 cw(c32.642,20.272) U15.5@32.945,20.575 ; 32.642,20.701 ccw(c32.642,21.13) U15.5@32.945,20.827 ; 32.642,20.701 cw(c32.642,20.272) U15.5@32.945,20.575 ; 32.642,20.701 ccw(c32.642,21.13) U15.5@32.945,20.827 ; 32.642,20.701 cw(c32.642,20.272) U15.5@32.945,20.575 ; 32.642,20.701 ccw(c32.642,21.13) U15.5@32.945,20.827 ; 32.642,20.701 cw(c32.642,20.272) U15.5@32.945,20.575 ; 32.642,20.701 ccw(c32.642,21.13) U15.5@32.945,20.827
SENSER11: C49.1 J8.12 R46.2 U15.3 | length 67.7
  Top Layer w0.254: J8.12@21.938,5.048 21.938,6.383 20.701,7.62 R46.2@20.701,9.906 C49.1@23.368,9.906 24.384,9.906 ; U15.3@33.782,23.241 30.48,23.241 30.277,23.038 30.277,17.22 28.373,15.316 24.892,15.316 24.765,15.189 24.765,10.287 24.384,9.906 ; R46.2@20.342,9.42 cw(c19.475,8.553) 20.701,8.553 ; R46.2@20.342,9.42 cw(c19.475,8.553) 20.701,8.553 ; R46.2@20.342,9.42 cw(c19.475,8.553) 20.701,8.553 ; R46.2@20.342,9.42 cw(c19.475,8.553) 20.701,8.553 ; 20.701,8.553 cw(c21.927,8.553) R46.2@21.06,9.42 ; 20.701,8.553 cw(c21.927,8.553) R46.2@21.06,9.42 ; 20.701,8.553 cw(c21.927,8.553) R46.2@21.06,9.42 ; 20.701,8.553 cw(c21.927,8.553) R46.2@21.06,9.42 ; R46.2@21.06,9.547 cw(c21.927,8.68) 21.927,9.906 ; R46.2@21.06,9.547 cw(c21.927,8.68) 21.927,9.906 ; R46.2@21.06,9.547 cw(c21.927,8.68) 21.927,9.906 ; R46.2@21.06,9.547 cw(c21.927,8.68) 21.927,9.906 ; R46.2@21.06,10.265 ccw(c21.927,11.132) 21.927,9.906 ; R46.2@21.06,10.265 ccw(c21.927,11.132) 21.927,9.906 ; R46.2@21.06,10.265 ccw(c21.927,11.132) 21.927,9.906 ; R46.2@21.06,10.265 ccw(c21.927,11.132) 21.927,9.906 ; J8.12@21.568,5.418 ccw(c20.675,6.311) 21.938,6.311 ; J8.12@21.568,5.418 ccw(c20.675,6.311) 21.938,6.311 ; J8.12@21.568,5.418 ccw(c20.675,6.311) 21.938,6.311 ; 21.938,6.311 ccw(c23.201,6.311) J8.12@22.308,5.418 ; 21.938,6.311 ccw(c23.201,6.311) J8.12@22.308,5.418 ; 21.938,6.311 ccw(c23.201,6.311) J8.12@22.308,5.418 ; 22.142,9.906 cw(c22.142,8.68) C49.1@23.009,9.547 ; 22.142,9.906 ccw(c22.142,11.132) C49.1@23.009,10.265 ; 22.142,9.906 cw(c22.142,8.68) C49.1@23.009,9.547 ; 22.142,9.906 ccw(c22.142,11.132) C49.1@23.009,10.265 ; 22.142,9.906 cw(c22.142,8.68) C49.1@23.009,9.547 ; 22.142,9.906 ccw(c22.142,11.132) C49.1@23.009,10.265 ; 22.142,9.906 cw(c22.142,8.68) C49.1@23.009,9.547 ; 22.142,9.906 ccw(c22.142,11.132) C49.1@23.009,10.265 ; C49.1@23.774,9.601 cw(c24.384,9.144) 24.384,9.906 ; C49.1@23.774,9.601 cw(c24.384,9.144) 24.384,9.906 ; C49.1@23.774,9.601 cw(c24.384,9.144) 24.384,9.906 ; C49.1@23.774,9.601 cw(c24.384,9.144) 24.384,9.906 ; C49.1@23.774,10.211 ccw(c24.384,10.668) 24.384,9.906 ; C49.1@23.774,10.211 ccw(c24.384,10.668) 24.384,9.906 ; C49.1@23.774,10.211 ccw(c24.384,10.668) 24.384,9.906 ; C49.1@23.774,10.211 ccw(c24.384,10.668) 24.384,9.906 ; 32.642,23.241 cw(c32.642,22.812) U15.3@32.945,23.115 ; 32.642,23.241 ccw(c32.642,23.67) U15.3@32.945,23.367 ; 32.642,23.241 cw(c32.642,22.812) U15.3@32.945,23.115 ; 32.642,23.241 ccw(c32.642,23.67) U15.3@32.945,23.367 ; 32.642,23.241 cw(c32.642,22.812) U15.3@32.945,23.115 ; 32.642,23.241 ccw(c32.642,23.67) U15.3@32.945,23.367 ; 32.642,23.241 cw(c32.642,22.812) U15.3@32.945,23.115 ; 32.642,23.241 ccw(c32.642,23.67) U15.3@32.945,23.367
SENSER12: C41.1 J8.6 R44.2 U15.1 | length 76.1
  Top Layer w0.254: R44.2@12.7,9.906 C41.1@15.367,9.906 ; J8.6@15.938,5.048 15.938,7.684 15.367,8.255 C41.1@15.367,9.906 ; U15.1@33.782,25.781 30.48,25.781 29.845,25.146 29.845,17.399 28.194,15.748 17.526,15.748 16.764,14.986 16.764,10.414 16.256,9.906 ; R44.2@13.059,9.547 cw(c13.926,8.68) 13.926,9.906 ; R44.2@13.059,9.547 cw(c13.926,8.68) 13.926,9.906 ; R44.2@13.059,9.547 cw(c13.926,8.68) 13.926,9.906 ; R44.2@13.059,9.547 cw(c13.926,8.68) 13.926,9.906 ; R44.2@13.059,10.265 ccw(c13.926,11.132) 13.926,9.906 ; R44.2@13.059,10.265 ccw(c13.926,11.132) 13.926,9.906 ; R44.2@13.059,10.265 ccw(c13.926,11.132) 13.926,9.906 ; R44.2@13.059,10.265 ccw(c13.926,11.132) 13.926,9.906 ; 14.141,9.906 cw(c14.141,8.68) C41.1@15.008,9.547 ; 14.141,9.906 ccw(c14.141,11.132) C41.1@15.008,10.265 ; 14.141,9.906 cw(c14.141,8.68) C41.1@15.008,9.547 ; 14.141,9.906 ccw(c14.141,11.132) C41.1@15.008,10.265 ; 14.141,9.906 cw(c14.141,8.68) C41.1@15.008,9.547 ; 14.141,9.906 ccw(c14.141,11.132) C41.1@15.008,10.265 ; 14.141,9.906 cw(c14.141,8.68) C41.1@15.008,9.547 ; 14.141,9.906 ccw(c14.141,11.132) C41.1@15.008,10.265 ; C41.1@15.008,9.42 cw(c14.141,8.553) 15.367,8.553 ; C41.1@15.008,9.42 cw(c14.141,8.553) 15.367,8.553 ; C41.1@15.008,9.42 cw(c14.141,8.553) 15.367,8.553 ; C41.1@15.008,9.42 cw(c14.141,8.553) 15.367,8.553 ; 15.367,8.553 cw(c16.593,8.553) C41.1@15.726,9.42 ; 15.367,8.553 cw(c16.593,8.553) C41.1@15.726,9.42 ; 15.367,8.553 cw(c16.593,8.553) C41.1@15.726,9.42 ; 15.367,8.553 cw(c16.593,8.553) C41.1@15.726,9.42 ; C41.1@15.367,9.906 16.256,9.906 ; J8.6@15.568,5.418 ccw(c14.675,6.311) 15.938,6.311 ; J8.6@15.568,5.418 ccw(c14.675,6.311) 15.938,6.311 ; J8.6@15.568,5.418 ccw(c14.675,6.311) 15.938,6.311 ; C41.1@15.805,9.648 cw(c16.256,9.382) 16.256,9.906 ; C41.1@15.805,9.648 cw(c16.256,9.382) 16.256,9.906 ; C41.1@15.805,9.648 cw(c16.256,9.382) 16.256,9.906 ; C41.1@15.805,9.648 cw(c16.256,9.382) 16.256,9.906 ; C41.1@15.805,10.164 ccw(c16.256,10.43) 16.256,9.906 ; C41.1@15.805,10.164 ccw(c16.256,10.43) 16.256,9.906 ; C41.1@15.805,10.164 ccw(c16.256,10.43) 16.256,9.906 ; C41.1@15.805,10.164 ccw(c16.256,10.43) 16.256,9.906 ; 15.938,6.311 ccw(c17.201,6.311) J8.6@16.308,5.418 ; 15.938,6.311 ccw(c17.201,6.311) J8.6@16.308,5.418 ; 15.938,6.311 ccw(c17.201,6.311) J8.6@16.308,5.418 ; 32.642,25.781 cw(c32.642,25.352) U15.1@32.945,25.655 ; 32.642,25.781 ccw(c32.642,26.21) U15.1@32.945,25.907 ; 32.642,25.781 cw(c32.642,25.352) U15.1@32.945,25.655 ; 32.642,25.781 ccw(c32.642,26.21) U15.1@32.945,25.907 ; 32.642,25.781 cw(c32.642,25.352) U15.1@32.945,25.655 ; 32.642,25.781 ccw(c32.642,26.21) U15.1@32.945,25.907 ; 32.642,25.781 cw(c32.642,25.352) U15.1@32.945,25.655 ; 32.642,25.781 ccw(c32.642,26.21) U15.1@32.945,25.907
SOLE-1: P4.1 U5.98 | length 18.4
  Top Layer w0.254: U5.98@69.272,70.151 80.819,70.151 81.153,70.485 81.153,71.755 81.545,72.147 P4.1@83.193,72.147 ; 81.945,72.147 cw(c81.945,71.534) P4.1@82.378,71.967 ; 81.945,72.147 ccw(c81.945,72.76) P4.1@82.378,72.326 ; 81.945,72.147 cw(c81.945,71.534) P4.1@82.378,71.967 ; 81.945,72.147 ccw(c81.945,72.76) P4.1@82.378,72.326 ; 81.945,72.147 cw(c81.945,71.534) P4.1@82.378,71.967 ; 81.945,72.147 ccw(c81.945,72.76) P4.1@82.378,72.326
SOLE-2: P5.1 U5.97 | length 24.5
  Top Layer w0.254: U5.97@69.272,69.651 81.225,69.651 82.296,68.58 P5.1@83.439,68.58 ; 81.659,69.217 ccw(c82.558,70.117) P5.1@82.558,68.845 ; 81.659,69.217 ccw(c82.558,70.117) P5.1@82.558,68.845 ; 81.659,69.217 ccw(c82.558,70.117) P5.1@82.558,68.845 ; 81.659,69.217 ccw(c82.558,70.117) P5.1@82.558,68.845 ; 82.076,68.974 cw(c81.876,68.228) P5.1@82.558,68.591 ; 82.076,68.974 cw(c81.876,68.228) P5.1@82.558,68.591 ; 82.076,68.974 cw(c81.876,68.228) P5.1@82.558,68.591 ; 82.076,68.974 cw(c81.876,68.228) P5.1@82.558,68.591 ; 82.076,68.974 cw(c81.876,68.228) P5.1@82.558,68.591 ; 82.076,68.974 cw(c81.876,68.228) P5.1@82.558,68.591 ; 82.092,68.784 ccw(c82.558,69.25) P5.1@82.558,68.591 ; 82.092,68.784 ccw(c82.558,69.25) P5.1@82.558,68.591 ; 82.092,68.784 ccw(c82.558,69.25) P5.1@82.558,68.591 ; 82.092,68.784 ccw(c82.558,69.25) P5.1@82.558,68.591
SOLE-3: P6.1 U5.96 | length 26.9
  Top Layer w0.254: U5.96@69.272,69.151 80.709,69.151 81.788,68.072 81.788,62.992 82.296,62.484 P6.1@83.312,62.484 ; 81.794,62.986 cw(c81.176,62.368) P6.1@82.05,62.368 ; 81.794,62.986 cw(c81.176,62.368) P6.1@82.05,62.368 ; 81.794,62.986 cw(c81.176,62.368) P6.1@82.05,62.368 ; 81.794,62.986 cw(c81.176,62.368) P6.1@82.05,62.368 ; 81.947,62.752 ccw(c82.488,62.897) P6.1@82.304,62.368 ; 81.947,62.752 ccw(c82.488,62.897) P6.1@82.304,62.368 ; 81.947,62.752 ccw(c82.488,62.897) P6.1@82.304,62.368 ; 81.947,62.752 ccw(c82.488,62.897) P6.1@82.304,62.368 ; 81.947,62.752 ccw(c82.488,62.897) P6.1@82.304,62.368 ; 81.947,62.752 ccw(c82.488,62.897) P6.1@82.304,62.368 ; P6.1@82.055,62.725 ccw(c82.304,62.974) P6.1@82.304,62.622 ; P6.1@82.055,62.725 ccw(c82.304,62.974) P6.1@82.304,62.622 ; P6.1@82.055,62.725 ccw(c82.304,62.974) P6.1@82.304,62.622 ; P6.1@82.055,62.725 ccw(c82.304,62.974) P6.1@82.304,62.622
SOLE-4: P7.1 U5.95 | length 32.9
  Top Layer w0.254: U5.95@69.272,68.651 80.447,68.651 81.28,67.818 81.28,54.61 81.026,54.356 P7.1@77.216,54.356 ; P7.1@78.039,54.06 cw(c78.753,53.346) 78.753,54.356 ; P7.1@78.039,54.06 cw(c78.753,53.346) 78.753,54.356 ; P7.1@78.039,54.06 cw(c78.753,53.346) 78.753,54.356 ; P7.1@78.039,54.06 cw(c78.753,53.346) 78.753,54.356
SOLE-5: P8.1 U5.93 | length 50.5
  Top Layer w0.254: U5.93@69.272,67.651 74.692,67.651 75.997,66.346 75.997,56.642 ; v1@76.505,56.134 v1(76.378,56.261) 75.997,56.642 ; P8.1@77.089,46.482 80.391,46.482 v1(80.518,46.609) ; 75.997,56.642 cw(c75.683,56.328) v1@76.125,56.285 ; 75.997,56.642 ccw(c76.311,56.956) v1@76.354,56.514 ; 75.997,56.642 cw(c75.683,56.328) v1@76.125,56.285 ; 75.997,56.642 ccw(c76.311,56.956) v1@76.354,56.514 ; 75.997,56.642 cw(c75.683,56.328) v1@76.125,56.285 ; 75.997,56.642 ccw(c76.311,56.956) v1@76.354,56.514 ; P8.1@77.912,46.313 cw(c78.319,45.906) 78.319,46.482 ; P8.1@77.912,46.313 cw(c78.319,45.906) 78.319,46.482 ; P8.1@77.912,46.313 cw(c78.319,45.906) 78.319,46.482 ; P8.1@77.912,46.313 cw(c78.319,45.906) 78.319,46.482 ; P8.1@77.912,46.672 ccw(c78.371,47.132) 78.371,46.482 ; P8.1@77.912,46.672 ccw(c78.371,47.132) 78.371,46.482 ; P8.1@77.912,46.672 ccw(c78.371,47.132) 78.371,46.482 ; P8.1@77.912,46.672 ccw(c78.371,47.132) 78.371,46.482 ; 79.598,46.482 ccw(c79.598,47.529) v1@80.338,46.789 ; 79.598,46.482 ccw(c79.598,47.529) v1@80.338,46.789 ; 79.598,46.482 ccw(c79.598,47.529) v1@80.338,46.789 ; 79.598,46.482 ccw(c79.598,47.529) v1@80.338,46.789
  Bottom Layer w0.254: v1(76.378,56.261) 79.375,56.261 80.518,55.118 v1(80.518,46.609) ; v1@76.557,56.081 cw(c76.991,55.648) 76.991,56.261 ; v1@76.557,56.081 cw(c76.991,55.648) 76.991,56.261 ; v1@76.557,56.081 cw(c76.991,55.648) 76.991,56.261 ; v1@76.557,56.441 ccw(c76.991,56.874) 76.991,56.261 ; v1@76.557,56.441 ccw(c76.991,56.874) 76.991,56.261 ; v1@76.557,56.441 ccw(c76.991,56.874) 76.991,56.261 ; v1@80.338,46.789 ccw(c79.905,47.222) 80.518,47.222 ; v1@80.338,46.789 ccw(c79.905,47.222) 80.518,47.222 ; v1@80.338,46.789 ccw(c79.905,47.222) 80.518,47.222 ; v1@80.338,46.789 ccw(c79.905,47.222) 80.518,47.222 ; 80.518,47.222 ccw(c81.131,47.222) v1@80.698,46.789 ; 80.518,47.222 ccw(c81.131,47.222) v1@80.698,46.789 ; 80.518,47.222 ccw(c81.131,47.222) v1@80.698,46.789 ; 80.518,47.222 ccw(c81.131,47.222) v1@80.698,46.789
SP: P1.4 R12.2 U8.4 | length 32.5
  Top Layer w0.508: U8.4@50.927,28.956 51.689,28.194 ; R12.2@51.816,26.543 R12.2@51.689,26.416 ; P1.4@59.682,29.453 58.536,29.453 58.229,29.146 ; R12.2@51.42,26.147 cw(c50.769,25.496) 51.689,25.496 ; R12.2@51.42,26.147 cw(c50.769,25.496) 51.689,25.496 ; R12.2@51.42,26.147 cw(c50.769,25.496) 51.689,25.496 ; R12.2@51.42,26.685 ccw(c50.769,27.336) 51.689,27.336 ; R12.2@51.42,26.685 ccw(c50.769,27.336) 51.689,27.336 ; R12.2@51.42,26.685 ccw(c50.769,27.336) 51.689,27.336 ; U8.4@51.675,28.921 ccw(c52.06,28.565) 51.689,28.194 ; U8.4@51.675,28.921 ccw(c52.06,28.565) 51.689,28.194 ; U8.4@51.675,28.921 ccw(c52.06,28.565) 51.689,28.194 ; U8.4@51.675,28.921 ccw(c52.06,28.565) 51.689,28.194 ; 51.689,25.496 cw(c52.609,25.496) R12.2@51.958,26.147 ; 51.689,25.496 cw(c52.609,25.496) R12.2@51.958,26.147 ; 51.689,25.496 cw(c52.609,25.496) R12.2@51.958,26.147 ; R12.2@51.689,26.416 51.689,28.194 ; R12.2@51.689,26.416 51.689,25.4 52.324,24.765 57.404,24.765 57.785,25.146 57.785,27.369 58.229,27.813 58.229,29.146 ; 51.689,27.336 ccw(c52.609,27.336) R12.2@51.958,26.685 ; 51.689,27.336 ccw(c52.609,27.336) R12.2@51.958,26.685 ; 51.689,27.336 ccw(c52.609,27.336) R12.2@51.958,26.685 ; 58.23,29.147 cw(c58.77,28.606) P1.4@59.008,29.332 ; 58.23,29.147 cw(c58.77,28.606) P1.4@59.008,29.332 ; 58.23,29.147 cw(c58.77,28.606) P1.4@59.008,29.332 ; 58.438,29.363 ccw(c58.478,30.088) P1.4@58.962,29.548 ; 58.438,29.363 ccw(c58.478,30.088) P1.4@58.962,29.548 ; 58.438,29.363 ccw(c58.478,30.088) P1.4@58.962,29.548
SPI1_MISO: U5.31 U7.2 | length 13.7
  Top Layer w0.254: U7.2@43.053,71.628 45.085,71.628 46.99,69.723 51.054,69.723 52.126,68.651 U5.31@54.172,68.651 ; 44.193,71.628 cw(c44.193,72.057) 43.89,71.754 ccw(c44.193,72.057) 44.193,71.628 ; 44.193,71.628 ccw(c44.193,71.199) 43.89,71.502 cw(c44.193,71.199) 44.193,71.628
SPI1_MOSI: U5.32 U7.5 | length 8.4
  Top Layer w0.254: U7.5@49.653,69.088 50.673,69.088 ; U5.32@54.172,68.151 51.61,68.151 50.673,69.088 ; 50.673,69.088 cw(c50.673,69.267) 50.518,69.177 ccw(c50.673,69.267) 50.673,69.088 ; 50.673,69.088 ccw(c50.673,68.909) 50.518,68.999 cw(c50.673,68.909) 50.673,69.088 ; U7.5@50.364,68.91 cw(c50.364,67.735) 51.195,68.566 ccw(c50.364,67.735) U7.5@50.364,68.91 ; U7.5@50.364,69.164 cw(c50.364,68.603) 50.761,69 ccw(c50.364,68.603) U7.5@50.364,69.164
SPI1_SCK: U5.30 U7.6 | length 6.4
  Top Layer w0.254: U7.6@49.653,70.358 51.054,70.358 52.261,69.151 U5.30@54.172,69.151 ; 50.793,70.358 cw(c50.793,70.787) 50.49,70.484 ccw(c50.793,70.787) 50.793,70.358 ; 50.793,70.358 ccw(c50.793,69.929) 50.49,70.232 cw(c50.793,69.929) 50.793,70.358
SPI2_MISO: J11.5 U5.53 | length 80.4
  Top Layer w0.254: J11.5@25.337,87.535 25.337,86.423 ; v1(41.656,55.499) 41.656,65.351 39.04,67.967 39.04,67.975 38.532,68.483 38.532,79.247 32.536,85.242 26.518,85.242 25.337,86.423 ; v1@56.329,53.968 ccw(c56.199,54.512) 56.683,54.232 ccw(c57.167,53.953) v1@56.631,53.793 ; 56.38,54.198 ccw(c56.781,53.966) v1(56.388,53.721) ; 56.591,54.564 ccw(c57.188,54.22) v1@56.604,53.855 ; U5.53@56.722,57.601 56.722,54.055 ; 25.337,86.423 cw(c26.3,86.423) 25.67,87.151 ccw(c26.3,86.423) 25.337,86.423 ; 25.337,86.423 ccw(c24.374,86.423) 25.004,87.151 cw(c24.374,86.423) 25.337,86.423 ; 41.656,56.112 cw(c41.043,56.112) 41.476,55.679 ccw(c41.043,56.112) 41.656,56.112 ; 41.656,56.112 ccw(c42.269,56.112) 41.836,55.679 cw(c42.269,56.112) 41.656,56.112 ; v1(56.388,53.721) ccw(c55.582,54.527) 56.722,54.527 cw(c55.582,54.527) v1(56.388,53.721) ; v1(56.388,53.721) 56.722,54.055 ; 56.722,54.055 cw(c56.501,54.276) 56.439,53.97 ccw(c56.501,54.276) 56.722,54.055 ; 56.722,54.055 ccw(c56.943,53.834) 56.637,53.772 cw(c56.943,53.834) 56.722,54.055 ; v1@56.208,53.901 ccw(c54.968,55.141) 56.722,55.141 cw(c54.968,55.141) v1@56.208,53.901
  Bottom Layer w0.254: v1(41.656,55.499) 43.078,54.077 53.111,54.077 53.645,53.543 56.21,53.543 v1(56.388,53.721) ; 55.784,53.656 cw(c55.937,53.392) v1@56.183,53.571 ; 42.09,55.065 cw(c42.523,55.499) 41.91,55.499 ccw(c42.523,55.499) 42.09,55.065 ; 42.09,55.065 ccw(c41.656,54.632) 41.656,55.245 cw(c41.656,54.632) 42.09,55.065 ; v1(56.388,53.721) cw(c55.959,54.15) 55.959,53.543 ccw(c55.959,54.15) v1(56.388,53.721) ; 55.346,53.543 ccw(c55.346,54.763) 56.208,53.901 cw(c55.346,54.763) 55.346,53.543
SPI2_MOSI: J11.6 U5.54 | length 80.4
  Top Layer w0.254: 25.977,88.856 cw(c26.207,89.713) J11.6@25.337,89.535 ; 26.016,88.895 ccw(c25.159,88.665) J11.6@25.337,89.535 ; v1(43.18,55.499) 43.18,64.438 39.472,68.146 39.472,68.154 38.964,68.662 38.964,79.426 32.715,85.674 27.229,85.674 26.289,86.614 26.289,88.583 J11.6@25.337,89.535 ; v1@54.102,53.975 55.245,52.832 56.769,52.832 57.222,53.285 U5.54@57.222,57.601 ; v1@54.207,53.998 cw(c54.277,53.847) 54.388,53.97 cw(c54.5,54.093) v1@54.342,54.147 ; 26.204,88.668 cw(c27.071,89.535) 25.845,89.535 ccw(c27.071,89.535) 26.204,88.668 ; 26.204,88.668 ccw(c25.337,87.801) 25.337,89.027 cw(c25.337,87.801) 26.204,88.668 ; 43.18,56.112 cw(c42.567,56.112) 43,55.679 ccw(c42.567,56.112) 43.18,56.112 ; 43.18,56.112 ccw(c43.793,56.112) 43.36,55.679 cw(c43.793,56.112) 43.18,56.112 ; v1(54.102,54.229) ccw(c54.715,54.229) 54.282,53.795 ; v1(54.102,54.229) cw(c53.762,53.565) 54.482,53.758 ; v1(54.102,54.229) cw(c53.762,53.565) 54.482,53.758 ; v1(54.102,54.229) ccw(c54.715,54.229) 54.282,53.795 ; v1(54.102,54.229) cw(c53.762,53.565) 54.482,53.758 ; v1(54.102,54.229) ccw(c54.715,54.229) 54.282,53.795 ; v1@54.356,54.229 ccw(c55.582,54.229) 54.715,53.362 ; v1@54.356,54.229 ccw(c55.582,54.229) 54.715,53.362 ; v1@54.356,54.229 ccw(c55.582,54.229) 54.715,53.362
  Bottom Layer w0.254: v1(43.18,55.499) 44.171,54.508 53.823,54.508 v1(54.102,54.229) ; 43.614,55.065 cw(c44.047,55.499) 43.434,55.499 ccw(c44.047,55.499) 43.614,55.065 ; 43.614,55.065 ccw(c43.18,54.632) 43.18,55.245 cw(c43.18,54.632) 43.614,55.065
SPI2_NSS: J11.4 U5.51 | length 67.1
  Top Layer w0.254: 27.977,90.214 ccw(c28.207,89.357) J11.4@27.337,89.535 ; 28.016,90.175 cw(c27.159,90.405) J11.4@27.337,89.535 ; v1(45.974,55.753) 45.974,62.865 40.335,68.504 40.335,68.512 39.827,69.02 39.827,79.784 33.147,86.464 33.147,88.265 30.937,90.475 28.277,90.475 J11.4@27.337,89.535 ; v1@55.499,55.372 55.722,55.595 ; U5.51@55.722,57.601 55.722,55.595 ; 28.204,90.402 cw(c27.337,91.269) 27.337,90.043 ccw(c27.337,91.269) 28.204,90.402 ; 28.204,90.402 ccw(c29.071,89.535) 27.845,89.535 cw(c29.071,89.535) 28.204,90.402 ; 45.974,56.366 cw(c45.361,56.366) 45.794,55.933 ccw(c45.361,56.366) 45.974,56.366 ; 45.974,56.366 ccw(c46.587,56.366) 46.154,55.933 cw(c46.587,56.366) 45.974,56.366 ; 55.722,55.595 cw(c55.549,55.768) 55.399,55.574 ccw(c55.549,55.768) 55.722,55.595
  Bottom Layer w0.254: v1(45.974,55.753) 46.355,55.372 v1(55.245,55.372) ; 54.632,55.372 cw(c54.632,54.759) 55.065,55.192 ccw(c54.632,54.759) 54.632,55.372 ; 54.632,55.372 ccw(c54.632,55.985) 55.065,55.552 cw(c54.632,55.985) 54.632,55.372
SPI2_SCK: J11.3 U5.52 | length 71.6
  Top Layer w0.254: J11.3@27.337,87.535 27.337,86.455 ; v1(44.577,55.626) 44.577,63.651 39.903,68.325 39.903,68.333 39.395,68.841 39.395,79.605 32.894,86.106 27.686,86.106 27.337,86.455 ; U5.52@56.222,57.601 56.222,55.079 55.372,54.229 v1(55.245,54.229) ; 27.337,86.455 cw(c28.231,86.455) 27.661,87.144 ccw(c28.231,86.455) 27.337,86.455 ; 27.337,86.455 ccw(c26.443,86.455) 27.013,87.144 cw(c26.443,86.455) 27.337,86.455 ; 44.577,56.239 cw(c43.964,56.239) 44.397,55.806 ccw(c43.964,56.239) 44.577,56.239 ; 44.577,56.239 ccw(c45.19,56.239) 44.757,55.806 cw(c45.19,56.239) 44.577,56.239 ; v1(55.245,54.229) cw(c55.791,54.026) 55.64,54.589 ; v1(55.245,54.229) cw(c55.791,54.026) 55.64,54.589 ; v1(55.245,54.229) cw(c55.791,54.026) 55.64,54.589 ; v1@55.245,54.483 ccw(c55.245,55.403) 55.895,54.752 ; v1@55.245,54.483 ccw(c55.245,55.403) 55.895,54.752 ; v1@55.245,54.483 ccw(c55.245,55.403) 55.895,54.752 ; v1@55.499,54.229 cw(c55.806,54.229) 55.589,54.446 ; v1@55.499,54.229 cw(c55.806,54.229) 55.589,54.446 ; v1@55.499,54.229 cw(c55.806,54.229) 55.589,54.446
  Bottom Layer w0.254: v1(44.577,55.626) 45.263,54.94 54.534,54.94 v1(55.245,54.229) ; 45.011,55.192 cw(c45.444,55.626) 44.831,55.626 ccw(c45.444,55.626) 45.011,55.192 ; 45.011,55.192 ccw(c44.577,54.759) 44.577,55.372 cw(c44.577,54.759) 45.011,55.192 ; 54.811,54.663 cw(c54.378,54.229) v1@54.991,54.229 ; 54.811,54.663 ccw(c55.245,55.096) v1@55.245,54.483 ; 54.811,54.663 cw(c54.378,54.229) v1@54.991,54.229 ; 54.811,54.663 ccw(c55.245,55.096) v1@55.245,54.483 ; 54.811,54.663 cw(c54.378,54.229) v1@54.991,54.229 ; 54.811,54.663 ccw(c55.245,55.096) v1@55.245,54.483
SWITCH1: D44.K J20.11 | length 13.8
  Top Layer w0.254: D44.K@111,20.892 cw(c111.545,20.347) 111.545,21.117 cw(c111.545,21.887) D44.K@111,21.343 ; D44.K@111.18,20.712 cw(c112.158,19.734) 112.158,21.117 ; D44.K@111.18,21.522 ccw(c112.158,22.5) 112.158,21.117 ; J20.11@114.681,21.369 114.648,21.336 112.377,21.336 112.158,21.117 ; 113.339,21.336 ccw(c113.339,22.711) J20.11@114.311,21.739 ; 113.339,21.336 ccw(c113.339,22.711) J20.11@114.311,21.739 ; 113.339,21.336 ccw(c113.339,22.711) J20.11@114.311,21.739 ; 113.498,21.336 cw(c113.498,20.186) J20.11@114.311,20.999 ; 113.498,21.336 cw(c113.498,20.186) J20.11@114.311,20.999 ; 113.498,21.336 cw(c113.498,20.186) J20.11@114.311,20.999 ; 113.952,21.336 ccw(c113.952,22.098) J20.11@114.491,21.559 ; 113.952,21.336 ccw(c113.952,22.098) J20.11@114.491,21.559 ; 113.952,21.336 ccw(c113.952,22.098) J20.11@114.491,21.559
SWITCH2: D45.K J20.9 | length 14.1
  Top Layer w0.254: D45.K@110.774,23.276 D45.K@110.809,23.242 ; D45.K@111,23.502 ccw(c111.627,24.128) 111.627,23.242 ; D45.K@111.18,22.871 cw(c112.076,21.975) 112.076,23.242 114.554,23.242 J20.9@114.681,23.369 ; D45.K@111.18,23.681 ccw(c112.24,24.742) 112.24,23.242 ; 113.112,23.242 ccw(c113.112,24.938) J20.9@114.311,23.739 ; 113.112,23.242 ccw(c113.112,24.938) J20.9@114.311,23.739 ; 113.112,23.242 ccw(c113.112,24.938) J20.9@114.311,23.739 ; 113.725,23.242 cw(c113.725,22.413) J20.9@114.311,22.999 ; 113.725,23.242 ccw(c113.725,24.325) J20.9@114.491,23.559 ; 113.725,23.242 cw(c113.725,22.413) J20.9@114.311,22.999 ; 113.725,23.242 ccw(c113.725,24.325) J20.9@114.491,23.559 ; 113.725,23.242 cw(c113.725,22.413) J20.9@114.311,22.999 ; 113.725,23.242 ccw(c113.725,24.325) J20.9@114.491,23.559
SWITCH3: D46.K J20.7 | length 22.4
  Top Layer w0.254: D46.K@110.774,25.435 110.968,25.242 114.687,25.242 J20.7@114.694,25.249 ; D46.K@111,25.661 ccw(c112.011,26.671) 112.011,25.242 ; D46.K@111,25.661 ccw(c112.011,26.671) 112.011,25.242 ; D46.K@111,25.661 ccw(c112.011,26.671) 112.011,25.242 ; D46.K@111.18,25.03 cw(c111.692,24.518) 111.692,25.242 ; D46.K@111.18,25.03 cw(c111.692,24.518) 111.692,25.242 ; D46.K@111.18,25.03 cw(c111.692,24.518) 111.692,25.242 ; D46.K@111.18,25.84 ccw(c112.624,27.285) 112.624,25.242 ; D46.K@111.18,25.84 ccw(c112.624,27.285) 112.624,25.242 ; D46.K@111.18,25.84 ccw(c112.624,27.285) 112.624,25.242 ; 113.112,25.242 ccw(c113.112,26.938) J20.7@114.311,25.739 ; 113.112,25.242 ccw(c113.112,26.938) J20.7@114.311,25.739 ; 113.112,25.242 ccw(c113.112,26.938) J20.7@114.311,25.739 ; 113.725,25.242 cw(c113.725,24.413) J20.7@114.311,24.999 ; 113.725,25.242 ccw(c113.725,26.325) J20.7@114.491,25.559 ; 113.725,25.242 cw(c113.725,24.413) J20.7@114.311,24.999 ; 113.725,25.242 ccw(c113.725,26.325) J20.7@114.491,25.559 ; 113.725,25.242 cw(c113.725,24.413) J20.7@114.311,24.999 ; 113.725,25.242 ccw(c113.725,26.325) J20.7@114.491,25.559
SWITCH4: D47.K J20.5 | length 39.3
  Top Layer w0.254: D47.K@110.774,27.594 111.127,27.242 J20.5@114.935,27.242 ; D47.K@110.82,27.64 ccw(c111.781,28.601) 111.781,27.242 ; D47.K@110.82,27.64 ccw(c111.781,28.601) 111.781,27.242 ; D47.K@110.82,27.64 ccw(c111.781,28.601) 111.781,27.242 ; D47.K@110.82,27.64 ccw(c111.781,28.601) 111.781,27.242 ; D47.K@111,27.82 ccw(c112.395,29.214) 112.395,27.242 ; D47.K@111,27.82 ccw(c112.395,29.214) 112.395,27.242 ; D47.K@111,27.82 ccw(c112.395,29.214) 112.395,27.242 ; D47.K@111,27.82 ccw(c112.395,29.214) 112.395,27.242 ; D47.K@111.043,27.421 cw(c111.329,27.237) 111.499,27.532 ; D47.K@111.043,27.421 cw(c111.329,27.237) 111.499,27.532 ; D47.K@111.043,27.421 cw(c111.329,27.237) 111.499,27.532 ; D47.K@111.043,27.421 cw(c111.329,27.237) 111.499,27.532 ; D47.K@111.043,27.421 cw(c111.329,27.237) 111.499,27.532 ; D47.K@111.043,27.421 cw(c111.329,27.237) 111.499,27.532 ; D47.K@111.18,27.999 ccw(c113.008,29.827) 113.008,27.242 ; D47.K@111.18,27.999 ccw(c113.008,29.827) 113.008,27.242 ; D47.K@111.18,27.999 ccw(c113.008,29.827) 113.008,27.242 ; D47.K@111.18,27.999 ccw(c113.008,29.827) 113.008,27.242 ; D47.K@111.256,27.284 cw(c111.553,27.092) 111.73,27.398 ; D47.K@111.256,27.284 cw(c111.553,27.092) 111.73,27.398 ; D47.K@111.256,27.284 cw(c111.553,27.092) 111.73,27.398 ; D47.K@111.256,27.284 cw(c111.553,27.092) 111.73,27.398 ; D47.K@111.256,27.284 cw(c111.553,27.092) 111.73,27.398 ; D47.K@111.256,27.284 cw(c111.553,27.092) 111.73,27.398 ; D47.K@111.328,27.742 ccw(c111.648,27.828) 111.482,27.541 ; D47.K@111.328,27.742 ccw(c111.648,27.828) 111.482,27.541 ; D47.K@111.328,27.742 ccw(c111.648,27.828) 111.482,27.541 ; D47.K@111.328,27.742 ccw(c111.648,27.828) 111.482,27.541 ; D47.K@111.328,27.742 ccw(c111.648,27.828) 111.482,27.541 ; D47.K@111.328,27.742 ccw(c111.648,27.828) 111.482,27.541 ; 113.112,27.242 ccw(c113.112,28.938) J20.5@114.311,27.739 ; 113.112,27.242 ccw(c113.112,28.938) J20.5@114.311,27.739 ; 113.112,27.242 ccw(c113.112,28.938) J20.5@114.311,27.739 ; 113.725,27.242 cw(c113.725,26.413) J20.5@114.311,26.999 ; 113.725,27.242 ccw(c113.725,28.325) J20.5@114.491,27.559 ; 113.725,27.242 cw(c113.725,26.413) J20.5@114.311,26.999 ; 113.725,27.242 ccw(c113.725,28.325) J20.5@114.491,27.559 ; 113.725,27.242 cw(c113.725,26.413) J20.5@114.311,26.999 ; 113.725,27.242 ccw(c113.725,28.325) J20.5@114.491,27.559
SWITCH5: D48.K J20.3 | length 22.1
  Top Layer w0.254: D48.K@110.774,29.753 112.614,29.753 112.949,29.418 J20.3@114.706,29.418 ; D48.K@111,29.528 cw(c111.545,28.983) 111.545,29.753 ; D48.K@111,29.528 cw(c111.545,28.983) 111.545,29.753 ; D48.K@111,29.528 cw(c111.545,28.983) 111.545,29.753 ; D48.K@111,29.979 ccw(c111.545,30.523) 111.545,29.753 ; D48.K@111,29.979 ccw(c111.545,30.523) 111.545,29.753 ; D48.K@111,29.979 ccw(c111.545,30.523) 111.545,29.753 ; D48.K@111.18,29.348 cw(c112.158,28.37) 112.158,29.753 ; D48.K@111.18,29.348 cw(c112.158,28.37) 112.158,29.753 ; D48.K@111.18,29.348 cw(c112.158,28.37) 112.158,29.753 ; D48.K@111.18,30.158 ccw(c112.158,31.136) 112.158,29.753 ; D48.K@111.18,30.158 ccw(c112.158,31.136) 112.158,29.753 ; D48.K@111.18,30.158 ccw(c112.158,31.136) 112.158,29.753 ; 113.299,29.418 cw(c113.299,27.987) J20.3@114.311,28.999 ; 113.299,29.418 cw(c113.299,27.987) J20.3@114.311,28.999 ; 113.299,29.418 cw(c113.299,27.987) J20.3@114.311,28.999 ; 113.537,29.418 ccw(c113.537,30.513) J20.3@114.311,29.739 ; 113.537,29.418 ccw(c113.537,30.513) J20.3@114.311,29.739 ; 113.537,29.418 ccw(c113.537,30.513) J20.3@114.311,29.739 ; 113.912,29.418 cw(c113.912,28.6) J20.3@114.491,29.179 ; 113.912,29.418 cw(c113.912,28.6) J20.3@114.491,29.179 ; 113.912,29.418 cw(c113.912,28.6) J20.3@114.491,29.179
SWITCH6: D49.K J20.1 | length 20.2
  Top Layer w0.254: D49.K@110.774,31.912 112.36,31.912 112.903,31.369 J20.1@114.681,31.369 ; D49.K@111,31.687 cw(c111.545,31.142) 111.545,31.912 ; D49.K@111,31.687 cw(c111.545,31.142) 111.545,31.912 ; D49.K@111,31.687 cw(c111.545,31.142) 111.545,31.912 ; D49.K@111,32.138 ccw(c111.545,32.682) 111.545,31.912 ; D49.K@111,32.138 ccw(c111.545,32.682) 111.545,31.912 ; D49.K@111,32.138 ccw(c111.545,32.682) 111.545,31.912 ; D49.K@111.18,31.507 cw(c112.158,30.529) 112.158,31.912 ; D49.K@111.18,31.507 cw(c112.158,30.529) 112.158,31.912 ; D49.K@111.18,31.507 cw(c112.158,30.529) 112.158,31.912 ; D49.K@111.18,32.317 ccw(c112.158,33.295) 112.158,31.912 ; D49.K@111.18,32.317 ccw(c112.158,33.295) 112.158,31.912 ; D49.K@111.18,32.317 ccw(c112.158,33.295) 112.158,31.912 ; 113.418,31.369 cw(c113.418,30.106) J20.1@114.311,30.999 ; 113.418,31.369 ccw(c113.418,32.632) J20.1@114.311,31.739 ; 113.418,31.369 cw(c113.418,30.106) J20.1@114.311,30.999 ; 113.418,31.369 ccw(c113.418,32.632) J20.1@114.311,31.739 ; 113.418,31.369 cw(c113.418,30.106) J20.1@114.311,30.999 ; 113.418,31.369 ccw(c113.418,32.632) J20.1@114.311,31.739